# Altium PCB CR99400.PcbDoc
Units mm, origin at the board's own origin, x right, y up, seen from the top; angles counter-clockwise.
Board outline 22 x 57.5 mm, 4 copper layers (L 01 (Top), L 02, L 03, L 04), stack 1.476 mm thick; 11 components, 23 nets, 88 pads, 0 vias.
Unrouted connection lines stored in the file: 44.
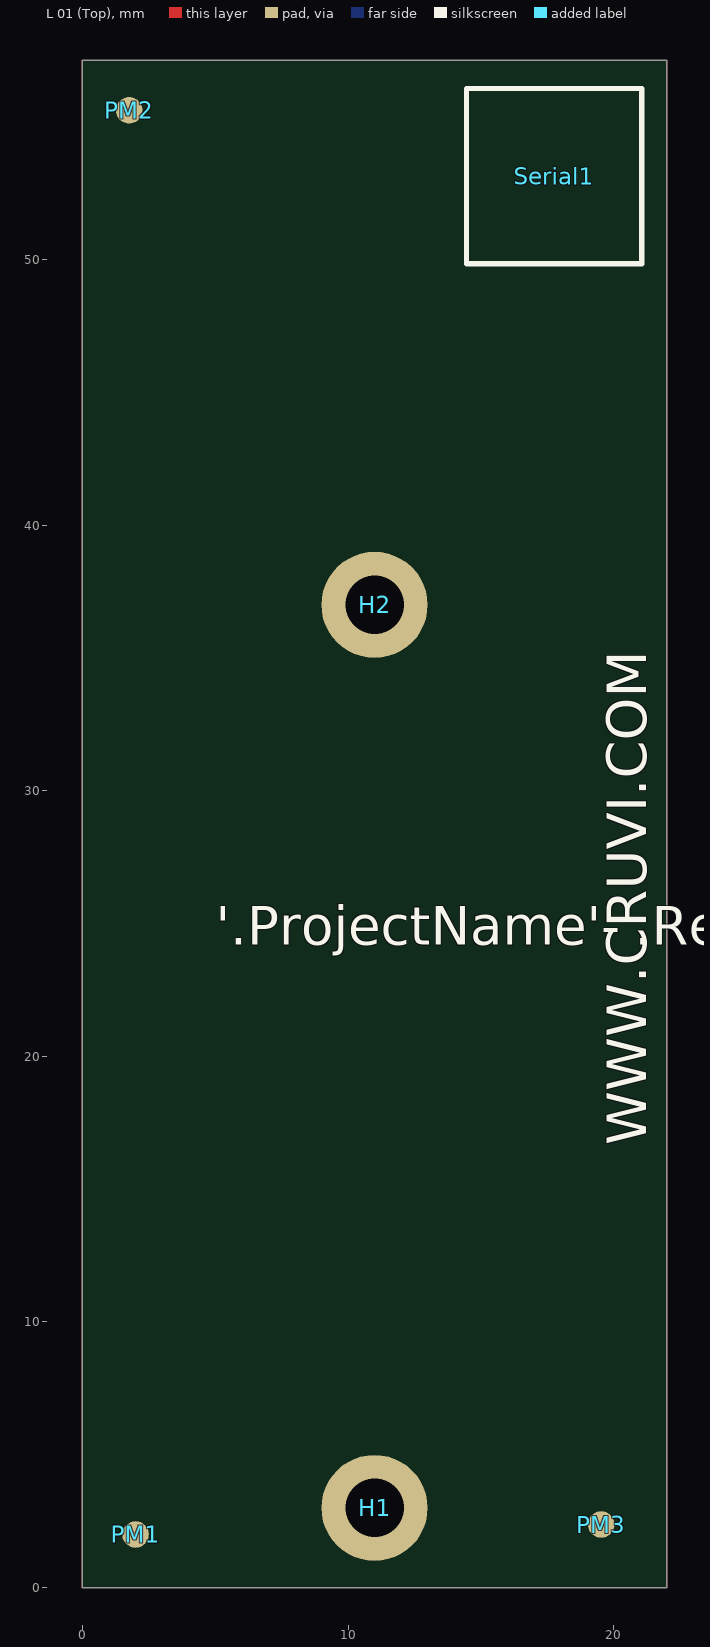
[diagram p0: L 01 (Top) view]
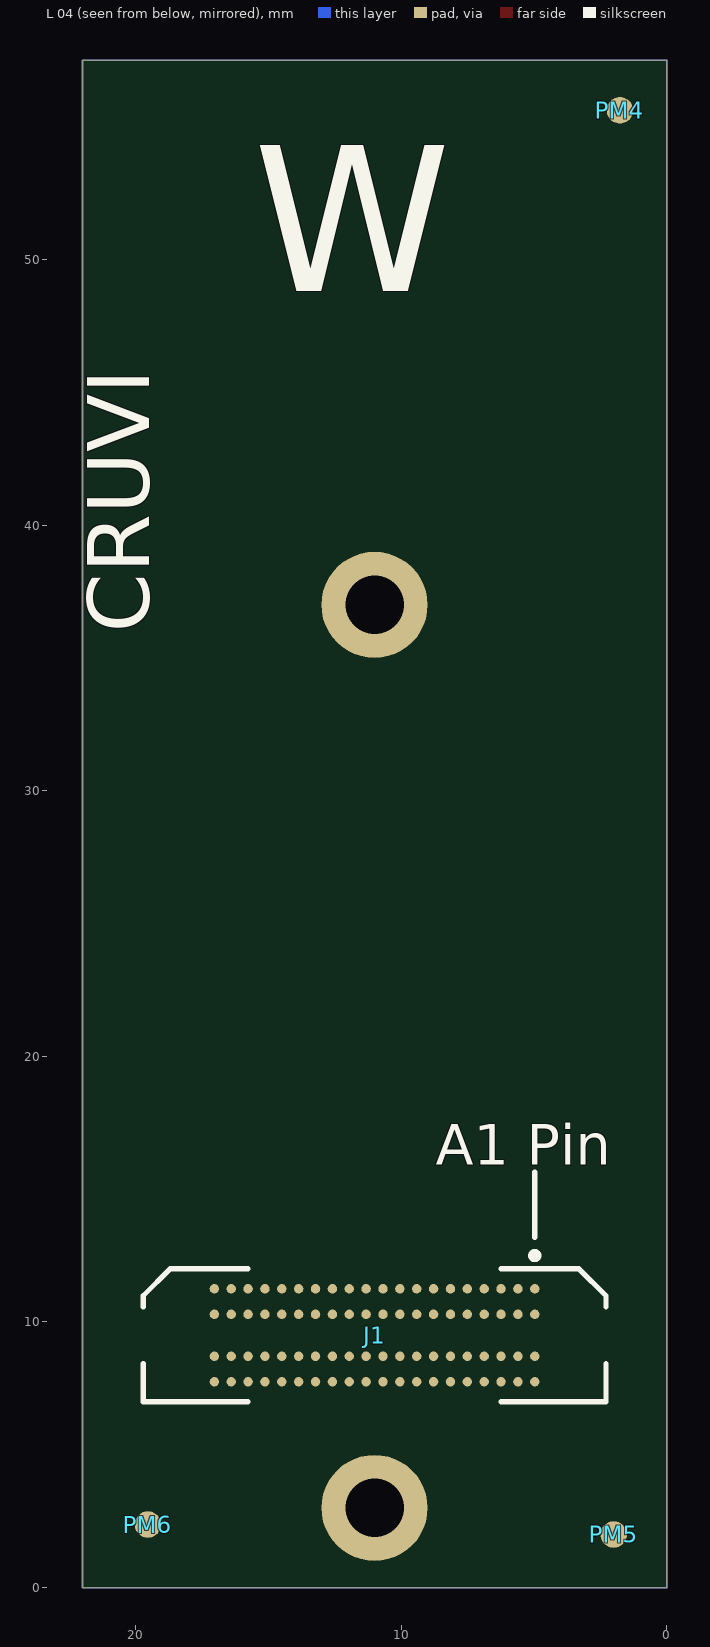
[diagram p1: L 04 view, seen from below]
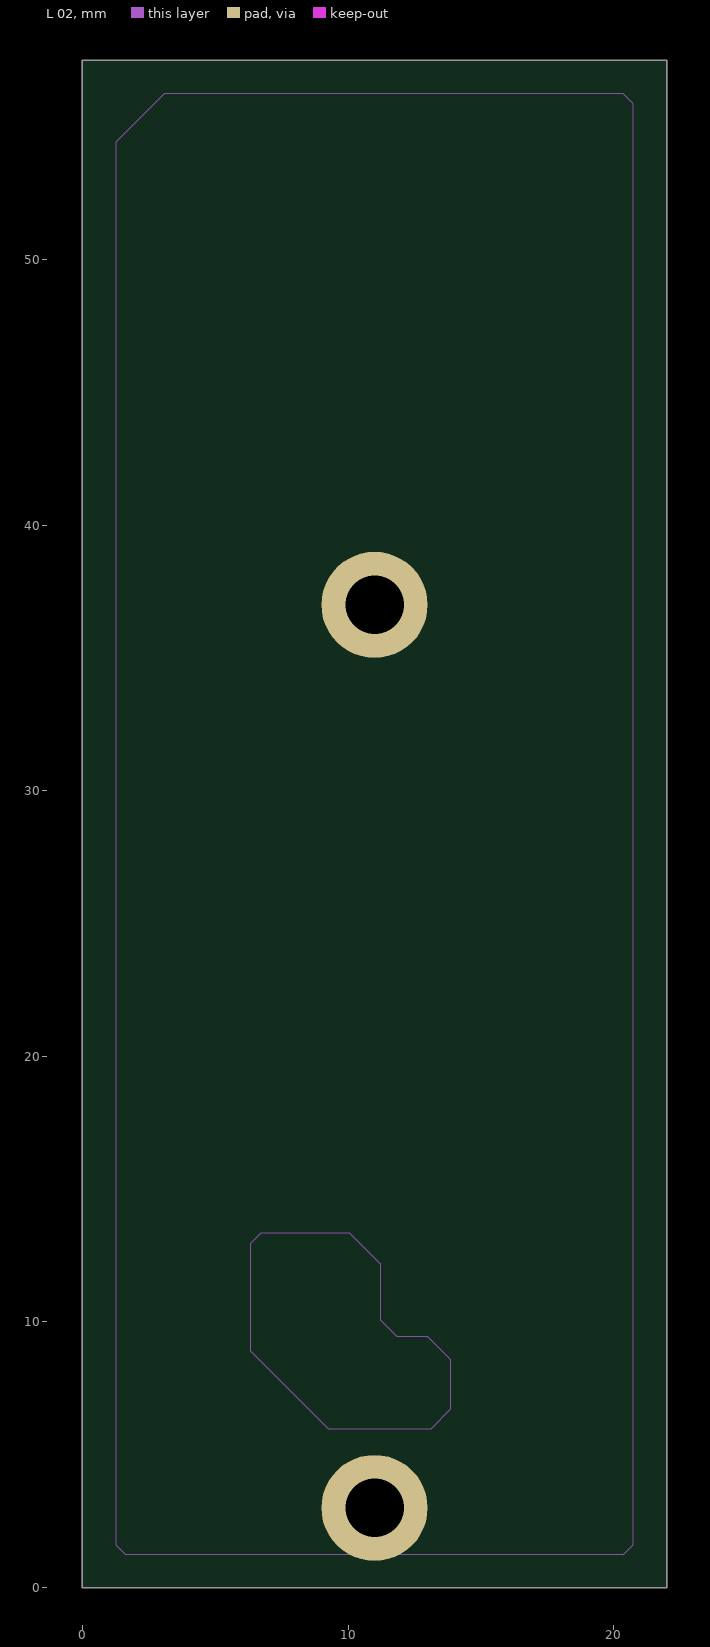
[diagram p2: L 02]
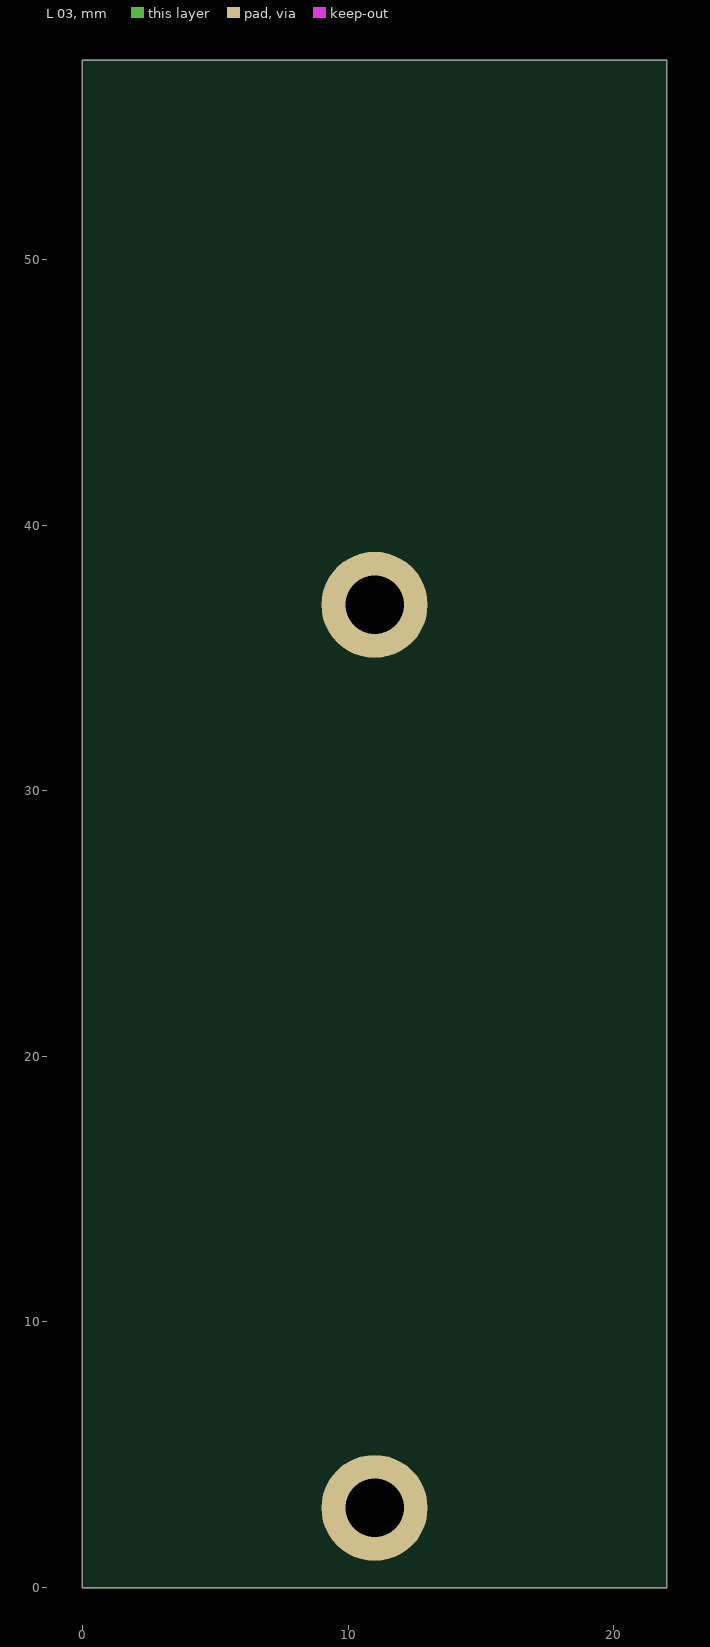
[diagram p3: L 03]

## Layer stack, top to bottom
Top Solder: solder mask 0.005, Solder Resist, Dk 4
L 01 (Top): signal copper 0.07
Dielectric1: prepreg 0.11, Dk 4.2
L 02: signal copper 0.018
Dielectric 2: core 1.08, Dk 4.2
L 03: signal copper 0.018
Dielectric 3: prepreg 0.11, Dk 4.2
L 04: signal copper 0.07
Bottom Solder: solder mask 0.005, Solder Resist, Dk 4

## Board outline
0,0 0,57.5 22,57.5 22,0

## Design rules (kind name [scope] priority, off if disabled: settings)
BoardOutlineClearance BoardOutlineClearance_Panel_Code [(ObjectKind = 'Track') And ((Layer = 'TopOverlay') OR (Layer = 'BottomOverlay')) And (Net = 'No Net') And (AsMM(Width) = 0.254)] p1: gap=0 except(0.5: Arc-OutlineEdge SMDPad-OutlineEdge THPad-OutlineEdge Via-OutlineEdge Fill-OutlineEdge Poly-OutlineEdge Region-OutlineEdge Text-OutlineEdge)
BoardOutlineClearance BoardOutlineClearance_Panel_Name [(ObjectKind = 'Text') And (Layer = 'TopOverlay') And (StringText = '''.Project''-''.Revision'' Panel Rev.01')] p2: gap=0 except(0.5: Arc-OutlineEdge Track-OutlineEdge SMDPad-OutlineEdge THPad-OutlineEdge Via-OutlineEdge Fill-OutlineEdge Poly-OutlineEdge Region-OutlineEdge)
BoardOutlineClearance BoardOutlineClearance_J2 [InComponent('J2') and (ObjectKind = 'Track') And (Layer = 'TopOverlay')] p3: gap=0 except(0.5: Arc-OutlineEdge SMDPad-OutlineEdge THPad-OutlineEdge Via-OutlineEdge Fill-OutlineEdge Poly-OutlineEdge Region-OutlineEdge Text-OutlineEdge)
BoardOutlineClearance [All] p4: gap=0 except(0.5: Arc-OutlineEdge Track-OutlineEdge SMDPad-OutlineEdge THPad-OutlineEdge Via-OutlineEdge Fill-OutlineEdge Poly-OutlineEdge Region-OutlineEdge Text-OutlineEdge)
Clearance "HV Clearance" [InNetClass('HV')] p1: gap=0.4
Clearance Clearance_ToUnplatedHole [IsPad and (HoleSize = 3.25) vs (IsVia or IsTrack OR InPoly)] p2: gap=0.2
Clearance Clearance_DiffPair_CLK [InDifferentialPair('CLK0_M2C') or InDifferentialPair('REFC') vs (InPolygon)] p3: gap=0.15
Clearance Clearance_DiffPair [(InDifferentialPairClass('All Differential Pairs')) vs (InPolygon)] p4: gap=0.4
Clearance Clearance_Polygon [(InPolygon)] p5: gap=0.125
Clearance [All] p6: gap=0.125
ComponentClearance ComponentClearance_logo [HasFootprint('FIDU-DOT - mini')] p1: gap=-0.05 collisioncheckmode=3 verticalgap=-0.1 showdistances=FALSE
ComponentClearance [All] p2: gap=-0.05 collisioncheckmode=3 verticalgap=0.254 showdistances=FALSE
DiffPairsRouting DIFF_85_OHM [InDifferentialPairClass('D85')] p1: maxlimit=10 minlimit=0.13 mostfreqgap=10 toplayer_maxgap=0.13 toplayer_prefgap=0.13 toplayer_minwidth=0.15 toplayer_maxwidth=0.15 toplayer_prefwidth=0.15 midlayer1_mingap=10 midlayer1_minwidth=10 midlayer1_maxwidth=10 midlayer1_prefwidth=10 midlayer2_mingap=10 midlayer2_minwidth=10 midlayer2_maxwidth=10 midlayer2_prefwidth=10 bottomlayer_maxgap=0.13 bottomlayer_prefgap=0.13 bottomlayer_minwidth=0.15 bottomlayer_maxwidth=0.15 bottomlayer_prefwidth=0.15 maxuncoupledlength=7
DiffPairsRouting DIFF_100_OHM [InAnyDifferentialPair] p2: maxlimit=10 minlimit=0.2 mostfreqgap=10 toplayer_maxgap=0.2 toplayer_prefgap=0.2 toplayer_minwidth=0.13 toplayer_maxwidth=0.13 toplayer_prefwidth=0.13 midlayer1_mingap=10 midlayer1_minwidth=10 midlayer1_maxwidth=10 midlayer1_prefwidth=10 midlayer2_mingap=10 midlayer2_minwidth=10 midlayer2_maxwidth=10 midlayer2_prefwidth=10 bottomlayer_maxgap=0.2 bottomlayer_prefgap=0.2 bottomlayer_minwidth=0.13 bottomlayer_maxwidth=0.13 bottomlayer_prefwidth=0.13 maxuncoupledlength=5
FabricationTestPointUsage TestPointUsage [All] p1: valid=0 allowmultiple=FALSE
FabricationTestpoint Testpoint [All] p1: side=3 testpointundercomponent=TRUE minsize=1.016 maxsize=2.54 preferedsize=1.524 minholesize=0 maxholesize=1.016 preferedholesize=0.813 testpointgrid=0.025 allowsidetop=TRUE allowsidebottom=TRUE usegrid=TRUE gridtolerance=0
HoleSize [All] p1: absolutevalues=TRUE maxlimit=5 minlimit=0.2 maxpercent=80.000 minpercent=20.000
Length Length_XTAL [InxSignalClass('xSignals_Y1_U1')] p1: maxlimit=19 minlimit=0
Length [InNetClass('MDI')] p2: maxlimit=100 minlimit=0
MatchedLengths xSignals_Y1_U1 [InxSignalClass('xSignals_Y1_U1')] p1: tolerance=0.001 checknetsindiffpair=FALSE checkdiffpairvsdiffpair=TRUE checkxsignals=TRUE checkothers=TRUE
MatchedLengths xSignals_U5_U1 [InxSignalClass('xSignals_U5_U1')] p2: tolerance=0.1 checknetsindiffpair=TRUE checkdiffpairvsdiffpair=FALSE checkxsignals=FALSE checkothers=FALSE
MatchedLengths xSignals_U4_U5 [InxSignalClass('xSignals_U4_U5')] p3: tolerance=0.1 checknetsindiffpair=TRUE checkdiffpairvsdiffpair=FALSE checkxsignals=FALSE checkothers=FALSE
MatchedLengths MDI [InNetClass('MDI')] p4: tolerance=0.5 checknetsindiffpair=FALSE checkdiffpairvsdiffpair=TRUE checkxsignals=TRUE checkothers=TRUE
MatchedLengths DIFF_P/N [All] p5: tolerance=0.01 checknetsindiffpair=TRUE checkdiffpairvsdiffpair=FALSE checkxsignals=FALSE checkothers=FALSE
MinimumAnnularRing [All] p1: minimumring=0.15
MinimumSolderMaskSliver [All] p1: minsoldermaskwidth=0.1
PlaneClearance [All] p1: clearance=0.4
PlaneConnect [All] p1: planeconnectstyle=Direct reliefexpansion=0.508 reliefentries=4 reliefconductorwidth=0.254 reliefairgap=0.254
PolygonConnect PolygonConnect_Direct [IsVia or (Component = 'H1') or (Component = 'H2')] p1: connectstyle=Direct reliefconductorwidth=0.254 reliefentries=4 polygonreliefangle="90 Angle" airgapwidth=0.254
PolygonConnect PolygonConnect_Relief [All] p2: connectstyle=Relief reliefconductorwidth=0.15 reliefentries=4 polygonreliefangle="90 Angle" airgapwidth=0.2
RoutingCorners [All] p1: cornerstyle=Round minsetback=2 maxsetback=2
RoutingLayers [All] p1: top layer_v5=TRUE mid layer 1_v5=FALSE mid layer 2_v5=TRUE bottom layer_v5=TRUE
RoutingVias [All] p1: holewidth=0.3 width=0.6 viastyle="Through Hole" minholewidth=0.2 minwidth=0.5 maxholewidth=1 maxwidth=3 useviatemplates=TRUE viatemplateguid#1={7A8C32A5-3C43-454A-B4B0-F51F54B22AD3} viatemplatename#1=v50h20m0mx0
SMDNeckDown [All] p1: percent=70.000
SilkToSilkClearance [All] p1: silktosilkclearance=0.1
SilkToSolderMaskClearance SilkscreenOverComponentPads [IsPad] p1: minsilkscreentomaskgap=0.01 clearancetoexposedcopper=TRUE
SolderMaskExpansion SolderMaskExpansion_VIA [(IsVia)] p1: expansion=0 soldermaskfromhole=TRUE
SolderMaskExpansion [All] p2: expansion=0
Width SE_50_OHM [All and not InNetClass('HV') and not InNetClass('PWR') and not InNet('GND')] p1: maxlimit=10 minlimit=0.15 preferedwidth=10 toplayer_maxwidth=0.15 toplayer_prefwidth=0.15 midlayer1_minwidth=10 midlayer2_minwidth=10 bottomlayer_maxwidth=0.15 bottomlayer_prefwidth=0.15 minimp=50.000000 maximp=50.000000 favimp=50.000000
Width ALL [All] p2: maxlimit=3 minlimit=0.15 preferedwidth=0.15 minimp=50.000000 maximp=50.000000 favimp=50.000000 checkconnectedcopper=TRUE
18 further rules are at their usual default settings.

## Classes and differential pairs
component class CRUVI: H1 H2 J1 SNAP1
component class CR99400: PM1 PM2 PM3 PM4 PM5 PM6 Serial1
net class PWR: 5V 12V
differential pair class D85: RX0 RX0C TX0 TX0C
differential pair class D100: CLK CLK0_M2C PCLK PHY_MDI0 PHY_MDI1 PHY_MDI2 PHY_MDI3 REFC

## Components (designator, comment, footprint, x,y, rotation, side; value= is the part's Value field where it differs from the comment)
H1 "Mount.Hole 2mm" MHole2_2mm 11,3 r0 top locked
H2 "Mount.Hole 2mm" MHole2_2mm 11,37 r0 top
J1 "ADM6-20-01.5-L-4-2" ADM6-20-01.5-L-4-2 11,9.5 r180 bottom locked
PM1 "FIDU-DOT - mini" "FIDU-DOT - mini" 2,2 r0 top
PM2 "FIDU-DOT - mini" "FIDU-DOT - mini" 1.762,55.62 r0 top
PM3 "FIDU-DOT - mini" "FIDU-DOT - mini" 19.531,2.375 r90 top
PM4 "FIDU-DOT - mini" "FIDU-DOT - mini" 1.762,55.62 r180 bottom
PM5 "FIDU-DOT - mini" "FIDU-DOT - mini" 2,2 r180 bottom
PM6 "FIDU-DOT - mini" "FIDU-DOT - mini" 19.531,2.375 r90 bottom
Serial1 "Serialnumber 6,3 x 6.3mm" Serial_6.3x6.3mm 17.763,53.145 r0 top
SNAP1 "SNAP CRUVI 3x" CRUVI_3x_Snap 33.86,28 r0 top locked

## Footprints (in the part's own frame and the unit in brackets; to place one, negate y for a bottom-side part, rotate by r counter-clockwise, add the part's x,y. Pads: shape width x height; smd on the part's side, far side on the other; paste and mask are expansions set on the pad)
ADM6-20-01.5-L-4-2 [mm]
  round 0.356 smd: A1(6.033,1.75) A2(5.398,1.75) A3(4.763,1.75) A4(4.128,1.75) A5(3.493,1.75) A6(2.858,1.75) A7(2.223,1.75) A8(1.588,1.75) A9(0.953,1.75) A10(0.318,1.75) A11(-0.317,1.75) A12(-0.952,1.75) A13(-1.587,1.75) A14(-2.222,1.75) A15(-2.857,1.75) A16(-3.492,1.75) A17(-4.127,1.75) A18(-4.762,1.75) A19(-5.397,1.75) A20(-6.032,1.75) B1(6.033,0.79) B2(5.398,0.79) B3(4.763,0.79) B4(4.128,0.79) B5(3.493,0.79) B6(2.858,0.79) B7(2.223,0.79) B8(1.588,0.79) B9(0.953,0.79) B10(0.318,0.79) B11(-0.317,0.79) B12(-0.952,0.79) B13(-1.587,0.79) B14(-2.222,0.79) B15(-2.857,0.79) B16(-3.492,0.79) B17(-4.127,0.79) B18(-4.762,0.79) B19(-5.397,0.79) B20(-6.032,0.79) C1(6.033,-0.79) C2(5.398,-0.79) C3(4.763,-0.79) C4(4.128,-0.79) C5(3.493,-0.79) C6(2.858,-0.79) C7(2.223,-0.79) C8(1.588,-0.79) C9(0.953,-0.79) C10(0.318,-0.79) C11(-0.317,-0.79) C12(-0.952,-0.79) C13(-1.587,-0.79) C14(-2.222,-0.79) C15(-2.857,-0.79) C16(-3.492,-0.79) C17(-4.127,-0.79) C18(-4.762,-0.79) C19(-5.397,-0.79) C20(-6.032,-0.79) D1(6.033,-1.75) D2(5.398,-1.75) D3(4.763,-1.75) D4(4.128,-1.75) D5(3.493,-1.75) D6(2.858,-1.75) D7(2.223,-1.75) D8(1.588,-1.75) D9(0.953,-1.75) D10(0.318,-1.75) D11(-0.317,-1.75) D12(-0.952,-1.75) D13(-1.587,-1.75) D14(-2.222,-1.75) D15(-2.857,-1.75) D16(-3.492,-1.75) D17(-4.127,-1.75) D18(-4.762,-1.75) D19(-5.397,-1.75) D20(-6.032,-1.75)
  silkscreen extent -8.71,-2.5 8.71,3.12, body extent -8.71,-2.5 8.71,2.5, height 4.03
CRUVI_3x_Snap [mm]
"FIDU-DOT - mini" [mm]
  round 1 smd paste-1: 0(0,0)
  body extent -0.5,-0.5 0.5,0.5, height 0.01
MHole2_2mm [mm]
  round 4 hole 2.2: 1(0,0)
Serial_6.3x6.3mm [mm]
  silkscreen extent -3.3,-3.3 3.3,3.3, body extent -3,-3 3,3, height 0.21

## Part data
H1 H2: library part 27273, "Mounting Hole 2mm Plated (Custom)"
J1: library part 33965
PM1 PM2 PM3 PM4 PM5 PM6: library part 27037, "FIDU-DOT - MINI 0.5mm"
Serial1: library part 26753
SNAP1: library part 29977, "SNAP for CRUVI 3x"

## Nets (pads, with @x,y where several pads share a name; then routed paths per layer and width w, separated by ;. In a path a pad name is that pad's centre, name@x,y a point inside that pad or via, vN(x,y) a via of type N, cw(c..) or ccw(c..) an arc to the next point about the centre after c; other vN are vias at no path point)
3.3V: J1.B11
5V: J1.C10
12V: J1.C11
ALERT: J1.C19
CLK0_M2C_N: J1.D8
CLK0_M2C_P: J1.D9
DEVOFF: J1.C18
GND: H1.1 H2.1 J1.A1 J1.A4 J1.A7 J1.A14 J1.A17 J1.A20 J1.C8 J1.C13 J1.D1 J1.D4 J1.D7 J1.D10 J1.D11 J1.D14 J1.D17 J1.D20
PE_WAKE: J1.B19
PERSTN: J1.B18
REFC_N: J1.D12
REFC_P: J1.D13
RX0_N: J1.A19
RX0_P: J1.A18
SCL: J1.C20
SDA: J1.B20
TCK: J1.B1
TDI: J1.C1
TDO: J1.C2
TMS: J1.B2
TX0_N: J1.D18
TX0_P: J1.D19
VADJ: J1.B10
pads on no net: J1.A2 J1.A3 J1.A5 J1.A6 J1.A8 J1.A9 J1.A10 J1.A11 J1.A12 J1.A13 J1.A15 J1.A16 J1.B3 J1.B4 J1.B5 J1.B6 J1.B7 J1.B8 J1.B9 J1.B12 J1.B13 J1.B14 J1.B15 J1.B16 J1.B17 J1.C3 J1.C4 J1.C5 J1.C6 J1.C7 J1.C9 J1.C12 J1.C14 J1.C15 J1.C16 J1.C17 J1.D2 J1.D3 J1.D5 J1.D6 J1.D15 J1.D16 PM1.0 PM2.0 PM3.0 PM4.0 PM5.0 PM6.0

## Polygon pours and split planes (outlines as drawn)
GND on L 02 "L02_GND_REF" (solid, remove dead copper, shelved, pour order 7): 6.316,12.947 6.316,8.922 9.258,5.98 13.126,5.98 13.877,6.731 13.877,8.575 13.011,9.441 11.853,9.441 11.236,10.058 11.236,12.178 10.073,13.341 6.71,13.341
GND on L 02 "L02_GND" (solid, remove dead copper, shelved, pour order 11): 0,0 0,57.5 22,57.5 22,0
3.3V on L 02 "L02_3.3V" (solid, remove dead copper, shelved, pour order 9): 1.25,54.412 1.25,1.61 1.612,1.248 20.379,1.248 20.748,1.617 20.748,55.867 20.369,56.246 3.084,56.246
GND on L 03 "L03_GND" (solid, remove dead copper, shelved, pour order 6): 0,57.5 0,0 22,0 22,57.5
GND on L 01 (Top) "L01_GND" (solid, remove dead copper, shelved, pour order 8): 0,0 0,57.5 22,57.5 22,0
GND on L 04 "L04_GND" (solid, remove dead copper, shelved, pour order 10): -0.03,57.5 21.97,57.5 21.97,0 -0.03,0

## Other copper
L 04:
  pour cut-out: 4.893,7.492 16.758,7.492 17.39,8.124 17.39,11.398 17.041,11.748 5.097,11.748 4.893,11.544

## Silkscreen, mask and mechanical layers (free items; w line width, h text height)
Top Overlay:
  text "'.ProjectName'-'.Revision'" at 5.013,23.715 h2.5
  text "WWW.CRUVI.COM" at 21.233,16.654 h1.5 r90
Bottom Overlay:
  lines w0.2: 4.967,13.193 4.967,15.641
  text "W" at 8.121,46.904 h10
  text "CRUVI" at 18.709,35.953 h4 r270
  text "A1 Pin" at 8.7,15.919 h1.52
Dim-Top-GM1:
  text "Top View" at -0.053,63.72 h1.5
Dim-Bot-GM2:
  text "'.Project'-'.Revision'-'.VariantName'" at -0.053,66.099 h1.5
  text "Top View" at -0.053,63.72 h1.5
PCB-Outline-GM6:
  the board outline again, w0.01
Assembly-Top-GM13:
  text "'.Project'-'.Revision'-'.VariantName'" at -0.053,66.099 h1.5
  text "Top View" at -0.053,63.72 h1.5
Assembly-Bot-GM14:
  text "'.Project'-'.Revision'-'.VariantName'" at 21.628,66.099 h1.5
  text "Bottom View" at 21.628,63.72 h1.5

## Dimensions
0,0 to 11,3 on Dim-Top2-GM7
11,37 to 0,0 on Dim-Top2-GM7
10,9.5 to 0,0 on Dim-Top2-GM7
11,3 to 22,0 on Dim-Top2-GM7
10,37 to 0,0 on Dim-Top-GM1
0,0 to 22,0 on Dim-Top-GM1
0,57.5 to 0,0 on Dim-Top-GM1
10.5,9.5 to 0,0 on Dim-Top-GM1
0,0 to 11,47.59 on Dim-Top-GM1
10.03,48.59 to 0,0 on Dim-Top-GM1
0,57.5 to 0,0 on Dim-Top2-GM7
0,0 to 22,0 on Dim-Top2-GM7
0,0 to 10,3 on Dim-Top-GM1

## Text inside footprints (layer, text, board x,y; h text height)
J1: Assembly-Bot-GM14 "D" at 2.075,7.575 h0.5; Assembly-Bot-GM14 "C" at 2.075,8.535 h0.5; Assembly-Bot-GM14 "B" at 2.075,10.115 h0.5; Assembly-Bot-GM14 "A" at 2.075,11.1 h0.5; Assembly-Bot-GM14 "1" at 5.085,12.3 h0.5; Assembly-Bot-GM14 "20" at 18.028,12.209 h0.5
Serial1: Assembly-Top-GM13 "SerialNr" at 15.273,50.646 h0.7
SNAP1: TDev-Notes-Top-GM11 "LS A connector" at 4.8,25.725 h0.7; TDev-Notes-Top-GM11 "LS B connector" at 27.66,25.75 h0.7; TDev-Notes-Top-GM11 "LS C connector" at 50.52,25.75 h0.7; TDev-Notes-Top-GM11 "HS Z connector" at 48.82,12.9 h0.7; TDev-Notes-Top-GM11 "HS Y connector" at 25.96,12.9 h0.7; TDev-Notes-Top-GM11 "HS X connector" at 3.1,12.9 h0.7; TDev-Notes-Top-GM11 "11" at 5.14,27 h0.7; TDev-Notes-Top-GM11 "12" at 5.14,32.1 h0.7; TDev-Notes-Top-GM11 "2" at 16.24,32.1 h0.7; TDev-Notes-Top-GM11 "1" at 16.44,27 h0.7; TDev-Notes-Top-GM11 "60" at 3.6,6.8 h0.7; TDev-Notes-Top-GM11 "59" at 3.6,11.6 h0.7; TDev-Notes-Top-GM11 "1" at 17.4,11.6 h0.7; TDev-Notes-Top-GM11 "2" at 17.3,6.8 h0.7; TDev-Notes-Top-GM11 "1" at 39.3,27 h0.7; TDev-Notes-Top-GM11 "2" at 39.1,32.1 h0.7; TDev-Notes-Top-GM11 "12" at 28,32.1 h0.7; TDev-Notes-Top-GM11 "11" at 28,27 h0.7; TDev-Notes-Top-GM11 "2" at 40.16,6.8 h0.7; TDev-Notes-Top-GM11 "1" at 40.26,11.6 h0.7; TDev-Notes-Top-GM11 "59" at 26.46,11.6 h0.7; TDev-Notes-Top-GM11 "60" at 26.46,6.8 h0.7; TDev-Notes-Top-GM11 "60" at 49.32,6.8 h0.7; TDev-Notes-Top-GM11 "59" at 49.32,11.6 h0.7; TDev-Notes-Top-GM11 "1" at 63.12,11.6 h0.7; TDev-Notes-Top-GM11 "2" at 63.02,6.8 h0.7; TDev-Notes-Top-GM11 "11" at 50.86,27 h0.7; TDev-Notes-Top-GM11 "12" at 50.86,32.1 h0.7; TDev-Notes-Top-GM11 "2" at 61.96,32.1 h0.7; TDev-Notes-Top-GM11 "1" at 62.16,27 h0.7